# Altium PCB Integrated LED.PcbDoc
Units mil, origin at the board's own origin, x right, y up, seen from the top; angles counter-clockwise.
Board outline 1985 x 2580 mil, 4 copper layers (Top Layer, Internal Plane 1, Internal Plane 2, Bottom Layer); 39 components, 34 nets, 132 pads, 81 vias.
Unrouted connection lines stored in the file: 1.
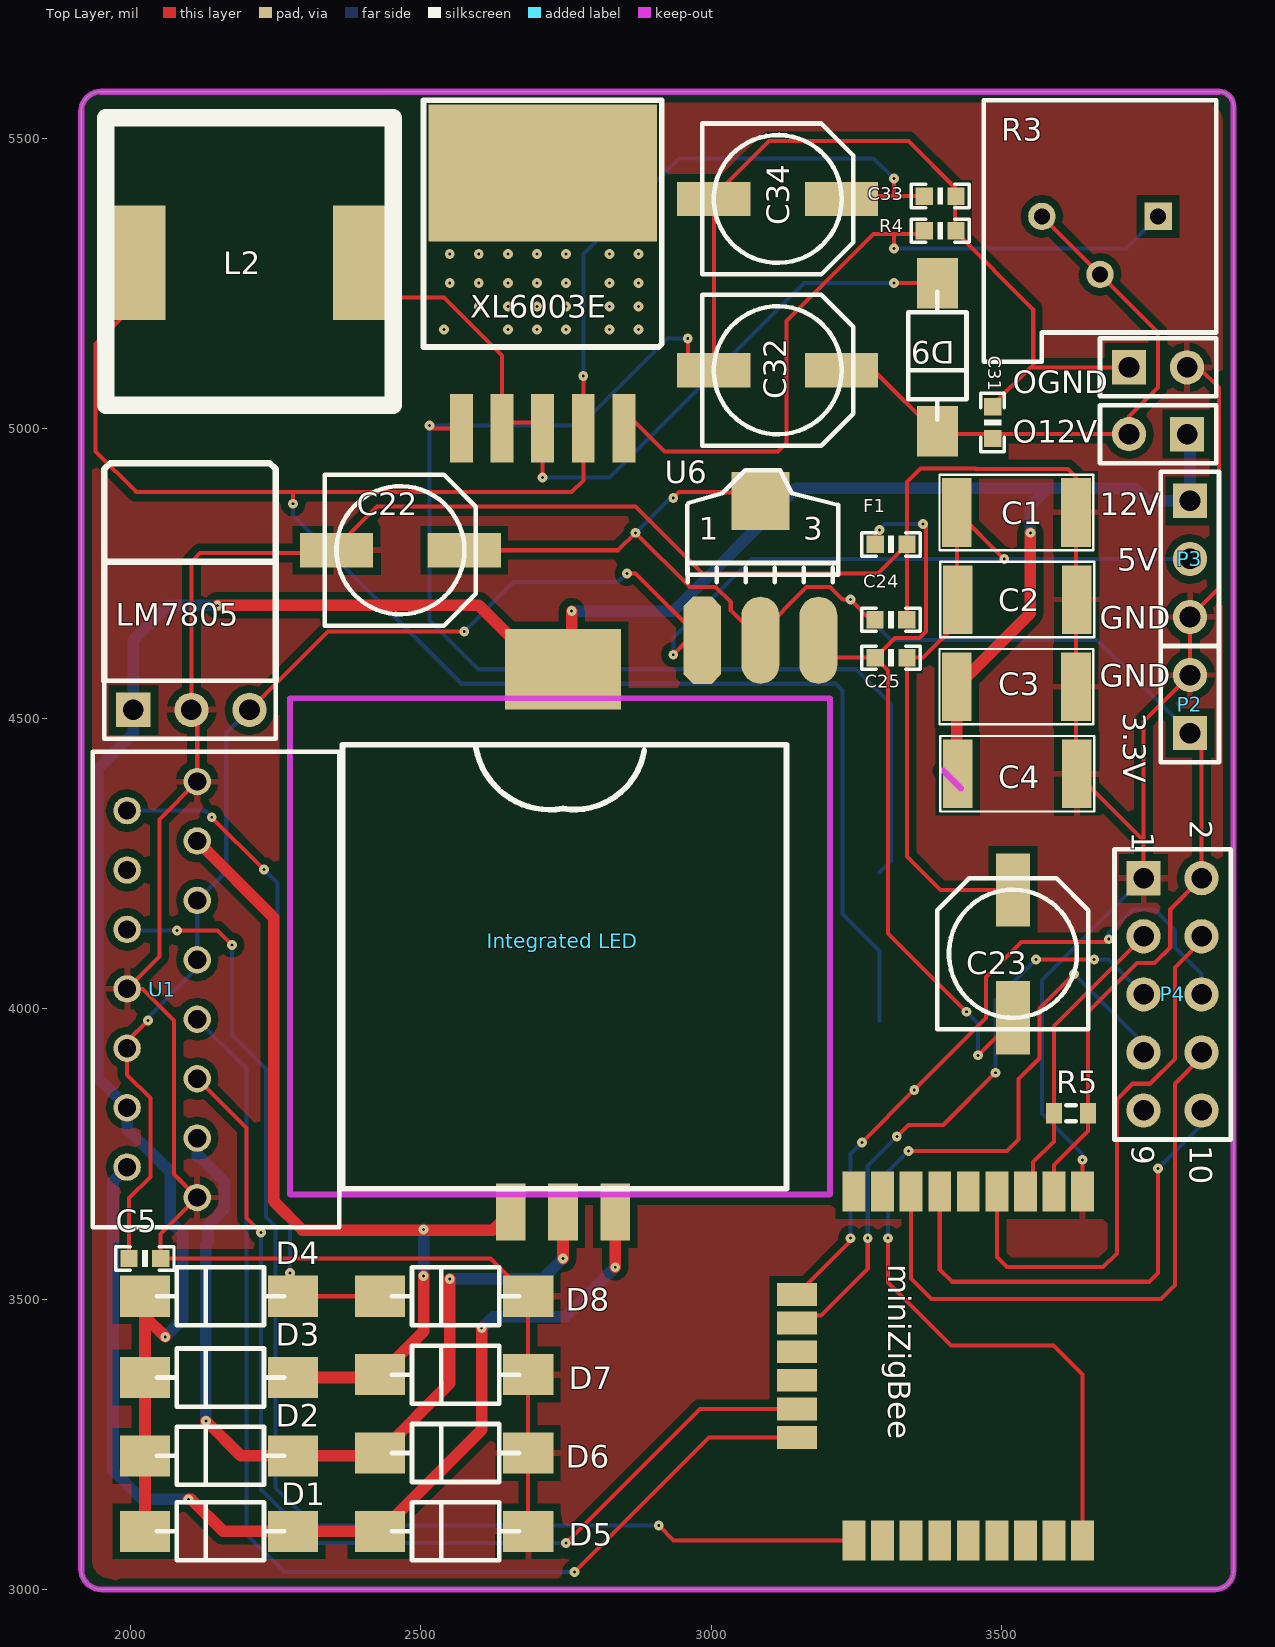
[diagram p0: Top Layer view]
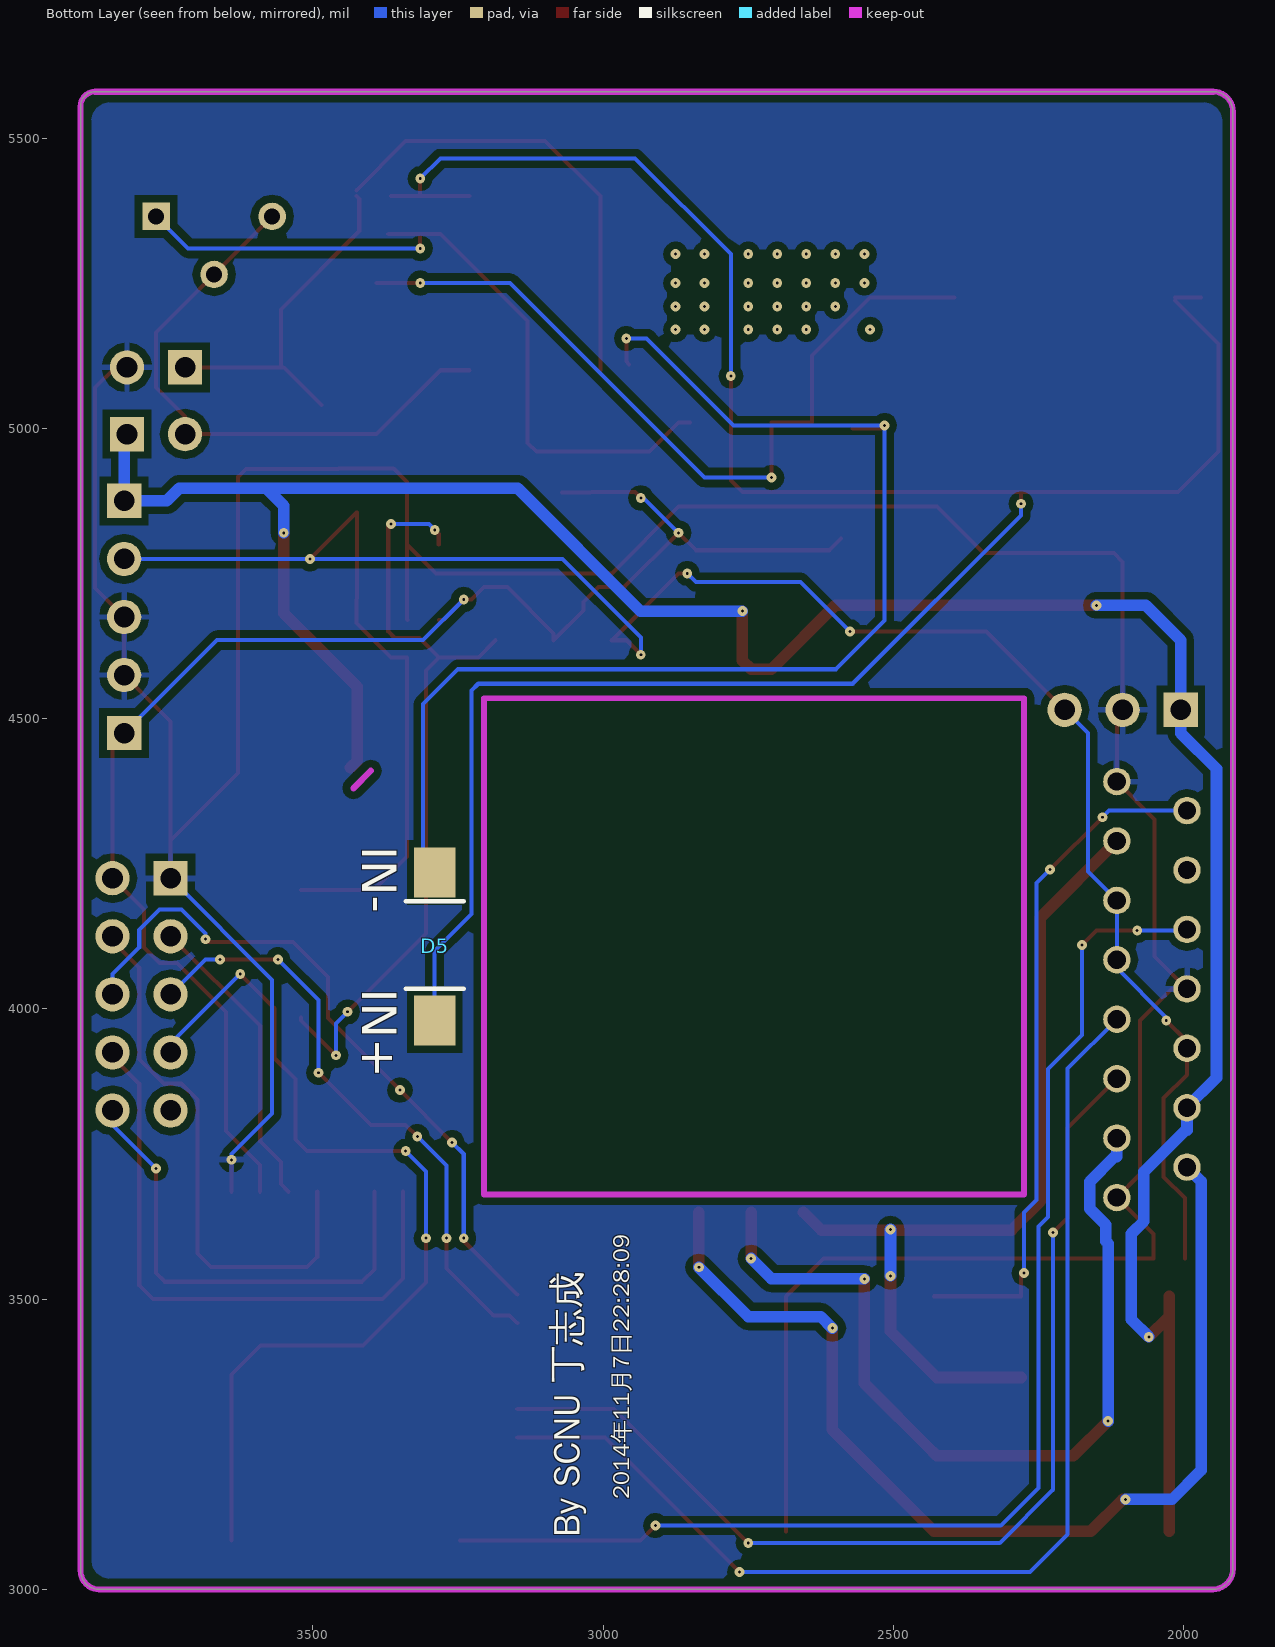
[diagram p1: Bottom Layer view, seen from below]
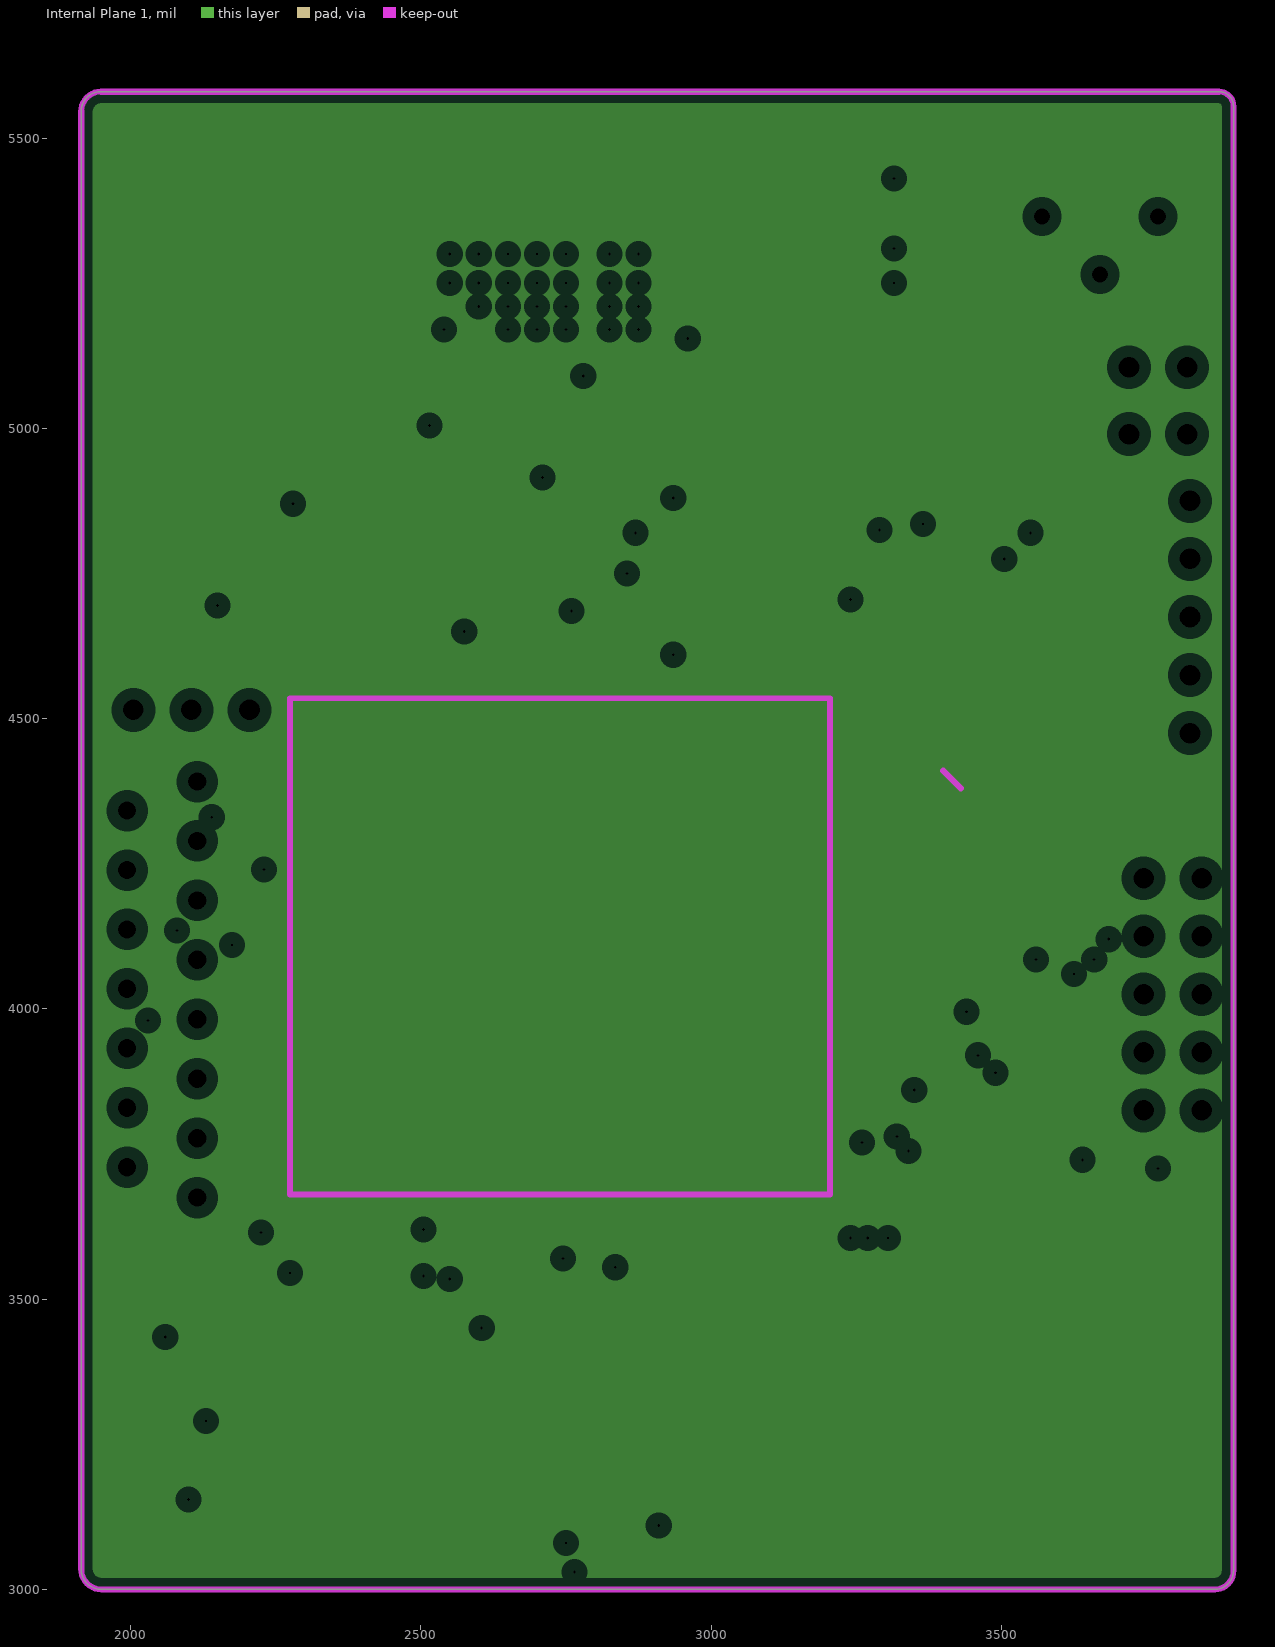
[diagram p2: Internal Plane 1, clearances drawn from the general rule]
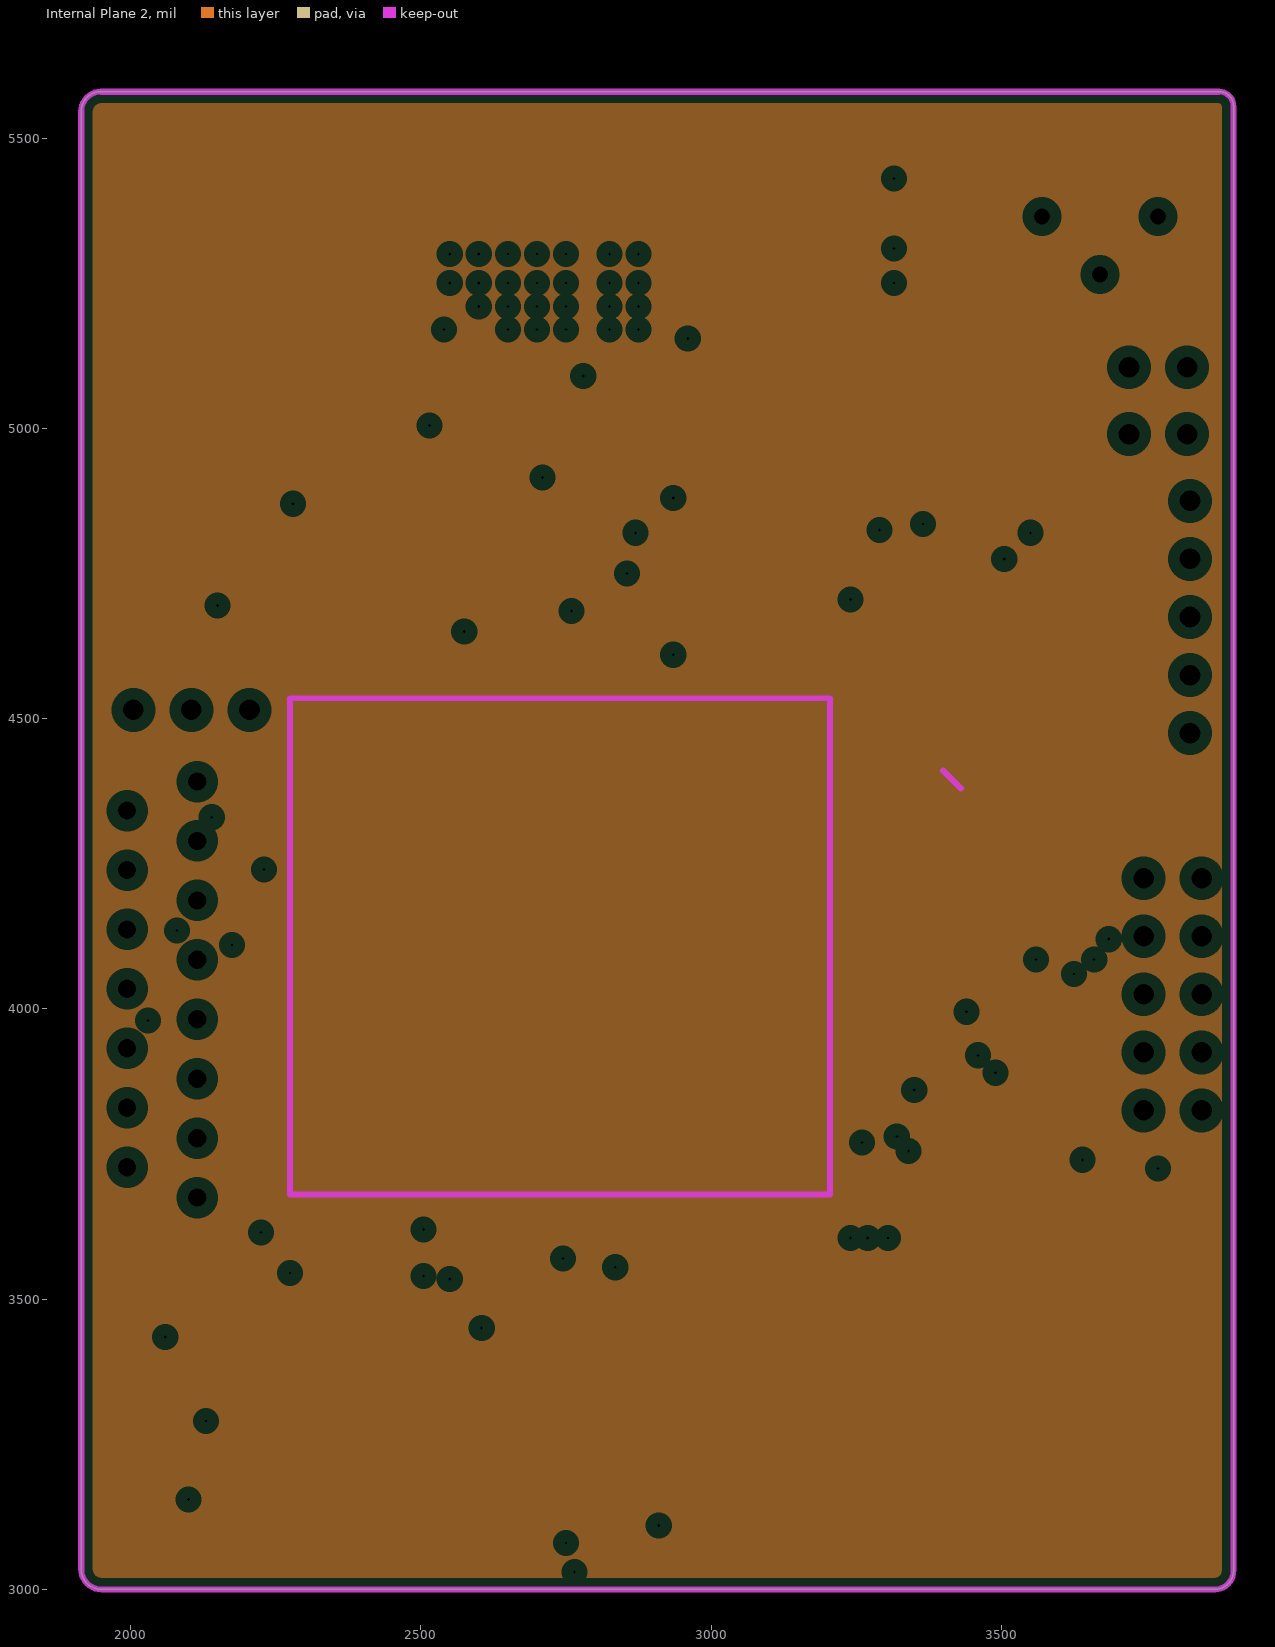
[diagram p3: Internal Plane 2, clearances drawn from the general rule]

## Layer stack, top to bottom
Top Layer: signal copper 1.4
Dielectric: dielectric 12.6, FR-4, Dk 4.8
Internal Plane 1: plane copper 1.4
Dielectric: dielectric 12.6, FR-4, Dk 4.8
Internal Plane 2: plane copper 1.4
Dielectric: dielectric 12.6, FR-4, Dk 4.8
Bottom Layer: signal copper 1.4

## Board outline
1915,3035 1915,5545.86 cw(c1949.14,5545.86) 1949.14,5580 3875,5580 cw(c3875,5555) 3900,5555 3900,3032.25 cw(c3867.75,3032.25) 3867.75,3000 1950,3000 cw(c1950,3035)

## Design rules (kind name [scope] priority, off if disabled: settings)
Clearance [All] p1: gap=13
FabricationTestpoint [(IsPad And (OnTopLayer Or OnBottomLayer))] p1: side=3 testpointundercomponent=TRUE minsize=40 maxsize=100 preferedsize=60 minholesize=0 maxholesize=40 preferedholesize=32 testpointgrid=1 allowsidetop=TRUE allowsidebottom=TRUE usegrid=TRUE gridtolerance=0.01
PlaneClearance [All] p1: clearance=20
PlaneConnect [All] p1: planeconnectstyle=Relief reliefexpansion=20 reliefentries=4 reliefconductorwidth=10 reliefairgap=10
PolygonConnect [All] p1: connectstyle=Relief reliefconductorwidth=10 reliefentries=4 polygonreliefangle="90 Angle" airgapwidth=10
RoutingVias [All] p1: holewidth=5 width=17 viastyle="Through Hole" minholewidth=5 minwidth=17 maxholewidth=5 maxwidth=17
SolderMaskExpansion [All] p1: expansion=4
Width Width_1 [All] p1: maxlimit=20 minlimit=7 preferedwidth=7 minimp=50.000000 maximp=50.000000 favimp=50.000000
Width [All] p2: maxlimit=20 minlimit=7 preferedwidth=7
25 further rules are at their usual default settings.

## Classes and differential pairs
component class "Integrated LED": C1 C2 C3 C4 C5 C22 C23 C24 C25 C31 C32 C33 C34 D1 D2 D3 D4 D5 D6 D7 D8 D9 F1 "Integrated LED" LM7805 miniZigBee P2 P3 P4 R5 U1 U6

## Components (designator, comment, footprint, x,y, rotation, side; value= is the part's Value field where it differs from the comment)
C1 "" PCBComponent_1 3423.5,4855 r0 top
C2 "" PCBComponent_1 3425,4705 r0 top
C3 "" PCBComponent_1 3423.5,4555 r0 top
C4 "" PCBComponent_1 3425,4405 r0 top
C5 "104" 0603P 2025,3570 r180 top
C22 "220uF" CC6.56.5 2465,4790 r180 top
C23 "220uF" CC6.56.5 3520,4095 r270 top
C24 "104" 0603P 3310,4670 r180 top
C25 "104" 0603P 3310,4605 r0 top
C31 "104" 0603P 3485,5010 r270 top (schematic designator C25)
C32 "220uF" CC6.56.5 3115,5100 r180 top (schematic designator C22)
C33 "104" 0603P 3395,5400 r180 top (schematic designator C25)
C34 "220uF" CC6.56.5 3115,5395 r180 top (schematic designator C22)
D1 "IN4007" IN4007#1 2280,3100 r180 top
D2 "IN4007" IN4007#1 2280,3230 r180 top
D3 "IN4007" IN4007#1 2280,3365 r180 top
D4 "IN4007" IN4007#1 2280,3505 r180 top
D5 "IN4007" IN4007#1 2685,3100 r180 top
D5 "IN4007" IN4007#2 3290,4235 r270 top
D6 "IN4007" IN4007#1 2685,3235 r180 top
D7 "IN4007" IN4007#1 2685,3370 r180 top
D8 "IN4007" IN4007#1 2685,3505 r180 top
D9 "IN4007" IN4007#1 3390,5250 r270 top (schematic designator D5)
F1 "500mA" 0603P 3310,4800 r0 top
"Integrated LED" "Integrated LED" "Integrated LED" 2745,4450 r0 top
L2 "Inductor" l 2205,5285 r180 top
LM7805 "LM7805" LM7805 2005,4515 r0 top
miniZigBee "miniZigBee" miniZigBee 3640,3685 r270 top
O12V "Header 2" HDR1X2 3820,4990 r180 top (schematic designator OUT+1)
OGND "Header 2" HDR1X2 3720,5105 r0 top (schematic designator OUT-1)
P2 "Header 2" HDR1X2 3825,4475 r90 top
P3 "Header 3" HDR1X3 3825,4875 r270 top
P4 "Header 5X2" HDR2X5 3745,4225 r270 top
R3 "103" VR4 3670,5315 r180 top
R4 "104" 0603P 3395,5340 r180 top (schematic designator C25)
R5 "Res3" J1-0603 3620,3820 r180 top
U1 "L298N" "L298N - duplicate" 2115,3675 r180 top
U6 "AMS1117-3.3" AMS1117 2985,4635 r0 top
XL6003E "XL6009e" XL6003 2710,5220 r0 top (schematic designator XL1)

## Footprints (in the part's own frame and the unit in brackets; to place one, negate y for a bottom-side part, rotate by r counter-clockwise, add the part's x,y. Pads: shape width x height; smd on the part's side, far side on the other; paste and mask are expansions set on the pad)
0603P [mil]
  rect 30x30 smd: 1(-27,0) 2(27.5,-0.06)
  silkscreen extent -50,-20 50,20
AMS1117 [mil]
  oct 65x150 smd: 1(0.03,-0.06)
  oval 65x150 smd: 2(100.03,-0.06) 3(200.03,-0.06)
  rect 100x100 smd: 4(100.03,239.94)
  silkscreen extent -26,100 234,293
CC6.56.5 [mm]
  rect 3.2x1.5 smd: 1(-2.794,0) 2(2.8,0)
  silkscreen extent -3.3,-3.3 3.3,3.3
HDR1X2 [mm] "Connector; Header; 2 Position"
  rect 1.5x1.5 hole 0.9: 1(0,0)
  round 1.5 hole 0.9: 2(2.54,0)
  silkscreen extent -1.27,-1.27 3.81,1.27
HDR1X3 [mm] "Connector; Header; 3 Position"
  rect 1.5x1.5 hole 0.9: 1(0,0)
  round 1.5 hole 0.9: 2(2.54,0) 3(5.08,0)
  silkscreen extent -1.27,-1.27 6.35,1.27
HDR2X5 [mm] "Connector; Header; 5x2 Position"
  rect 1.5x1.5 hole 0.9: 1(0,0)
  round 1.5 hole 0.9: 2(0,2.54) 3(2.54,0) 4(2.54,2.54) 5(5.08,0) 6(5.08,2.54) 7(7.62,0) 8(7.62,2.54) 9(10.16,0) 10(10.16,2.54)
  silkscreen extent -1.27,-1.27 11.43,3.81
IN4007#1 [mm]
  rect 2.2x1.8 smd: 1(0,0) 2(6.477,0)
  silkscreen extent 0.38,-1.27 5.97,1.27
IN4007#2 [mm]
  rect 2.2x1.8 smd far side: 1(0,0) 2(6.477,0)
"Integrated LED" [mm] "Integrated LED"
  rect 5.08x3.524 smd: 1(0,3.429)
  rect 1.3x2.5 smd: 2(-2.286,-20.32) 3(0,-20.32) 4(2.286,-20.32)
  Keep-Out Layer lines w0.254: -11.938,-19.558 -11.938,2.159 11.684,2.159 11.684,-19.558 -11.938,-19.558
  silkscreen extent -9.65,-19.3 9.78,0.13
J1-0603 [mm] "Chip Resistor, Body 1.6x0.8mm, IPC High Density"
  rect 0.7x0.9 smd: 1(-0.75,0) 2(0.75,0)
  silkscreen extent -0.2,-0.35 0.2,0.35, body extent -0.85,-0.48 0.85,0.48, height 0.9
l [mm]
  rect 2.45x5 smd: 0(-4.889,0) 1(4.889,0)
  silkscreen extent -6.29,-6.35 6.29,6.22
"L298N - duplicate" [mm]
  round 1.2 hole 0.8: 1(0,0) 2(3.068,-1.33) 3(0,-2.6) 4(3.068,-3.93) 5(0,-5.2) 6(3.068,-6.53) 7(0,-7.8) 8(3.068,-9.13) 9(0,-10.4) 10(3.068,-11.73) 11(0,-13) 12(3.068,-14.33) 13(0,-15.6) 14(3.068,-16.93) 15(0,-18.2)
  silkscreen extent -6.22,-19.5 4.57,1.3
LM7805 [mm]
  rect 1.5x1.5 hole 0.9: 1(0,0)
  round 1.5 hole 0.9: 3(5.08,0) 4(2.54,0)
  silkscreen extent -1.27,-1.27 6.22,10.79
miniZigBee [mm] "miniZigBee"
  rect 1.75x1 smd: 1(0,0) 2(0,-1.25) 3(0,-2.5) 4(0,-3.75) 5(0,-5) 6(0,-6.25) 7(0,-7.5) 8(0,-8.75) 9(0,-10) 16(15.25,-10) 17(15.25,-8.75) 18(15.25,-7.5) 19(15.25,-6.25) 20(15.25,-5) 21(15.25,-3.75) 22(15.25,-2.5) 23(15.25,-1.25) 24(15.25,0)
  rect 1x1.75 smd: 10(4.5,-12.5) 11(5.75,-12.5) 12(7,-12.5) 13(8.25,-12.5) 14(9.5,-12.5) 15(10.75,-12.5)
PCBComponent_1 [mm]
  rect 1.3x3 smd: 1(0,0) 2(5.207,0)
  silkscreen extent -0.76,-1.65 5.97,1.65
VR4 [mm] "Feed-Through Capacitor; 3 Leads"
  rect 1.2x1.2 hole 0.7: 1(-2.54,-1.27)
  round 1.2 hole 0.7: 2(0,1.27) 3(2.54,-1.27)
  silkscreen extent -5.08,-6.35 5.08,5.08
XL6003 [mm]
  rect 10x6 smd: 0(0,5.588)
  rect 1x3 smd: 1(-3.556,-5.588) 2(-1.778,-5.588) 3(0,-5.588) 4(1.778,-5.588) 5(3.556,-5.588)
  silkscreen extent -5.21,-2.03 5.21,8.76

## Part data
C1 C2 C3 C4: library part Cap2, "Capacitor"
C5 C24 C25 C31 C33 R4: library part C
C22 C23 C32 C34: library part CAP
F1: library part R
O12V OGND P2: "Header, 2-Pin"
P3: "Header, 3-Pin"
P4: "Header, 5-Pin, Dual row"
R3: library part RPot, "Potentiometer"
R5: "Resistor"
U6: library part AMS1117

## Via types
v1: diameter 17, hole 5, Top Layer to Bottom Layer, 81 vias

## Nets (pads, with @x,y where several pads share a name; then routed paths per layer and width w, separated by ;. In a path a pad name is that pad's centre, name@x,y a point inside that pad or via, vN(x,y) a via of type N, cw(c..) or ccw(c..) an arc to the next point about the centre after c; other vN are vias at no path point)
BLUE: "Integrated LED.2" D3.1 D7.2 U1.13 | length 1549.9
  Top Layer w20: U1.13 2247,4157.17 2247,3668.4 2296.4,3619 2624,3619 2655,3650 ; D3.1 2425,3365 D7.2 2505,3445 v1(2505,3540)
  Bottom Layer w20: v1(2505,3540) v1(2505,3620)
GND: C1.2 C2.2 C3.2 C4.2 C5.1 C22.2 C24.1 D5.1@2685,3100 D6.1 D7.1 D8.1 F1.2 LM7805.4 miniZigBee.1 OGND.2 P2.2 P3.3 P4.1 U1.1 U1.8 U1.15 | length 6579.5
  Top Layer w7: D5.1@2685,3100 D8.1 2620,3570 C5.1 2052,3612 U1.1 2074.88,3715.12 2074.88,3980.12 2020.55,4034.45 U1.8 2050,4090.24 2050,4326.54 U1.15 2115,4505 LM7805.4 2105,4770 2120,4785 2344.76,4785 2424.76,4865 2870,4865 2985,4750 3287.56,4750 F1.2 ; C24.1 3337.5,4670.5 3337.5,4907.5 3360.56,4930.56 3455.93,4930.56 3456.48,4930 3615,4930 3628.5,4916.5 3628.5,4406.5 3745,4290 ; miniZigBee.1 v1(3640,3740) ; P4.1 3745,4495 P2.2 P3.3 3875,4725 3875,5070 3840,5105 OGND.2
  Bottom Layer w7: v1(3640,3740) 3640,3750 3570,3820 3570,4050 P4.1
GREEN: "Integrated LED.3" D2.1 D6.2 U1.3 | length 1484.2
  Top Layer w20: v1(2130,3290) 2190,3230 D2.1 2425,3230 D6.2 2550,3355 v1(2550,3535) ; v1(2745,3570) 2745,3650
  Bottom Layer w20: 2115,3745 U1.3 ; 2119.07,3745 2161.62,3702.44 2161.62,3655.69 2134.31,3628.38 2134.31,3600.05 2130,3595.74 v1(2130,3290) ; v1(2550,3535) 2710,3535 v1(2745,3570)
Net33_1: C31.1 C32.2 C33.1 C34.2 D5.1@3290,4235 OGND.1 R4.1 XL6003E.1 | length 3502.9
  Top Layer w7: v1@2520,5000 XL6003E.1 ; C32.2@2955,5110 2960,5115 v1(2960,5155) ; C32.2@3005,5100 3004.76,5100.24 3004.76,5399.76 3100,5495 3340,5495 C33.1@3425,5410 ; C33.1@3425,5400 3420,5395 3420,5340 3555,5205 3555,5105 ; C31.1@3485,5040 3550,5105 OGND.1
  Bottom Layer w7: v1(2960,5155) 2925,5155 2775,5005 v1(2515,5005) 2515,4668.75 2598.75,4585 3250,4585 3310,4525 3310,4255 D5.1@3290,4235
Net33_2: C33.2 C34.1 D5.2@3290,3980 L2.1 XL6003E.4 | length 4092.4
  Top Layer w7: L2.1@1970,5225 L2.1@2015,5225 ; L2.1@2015,5220 1940,5145 1940,4960 2010,4890 2760,4890 2780,4910 v1(2780,5090) ; v1(2280,4870) 2280,4890 ; C34.1@3230,5400 C33.2@3365,5400 ; 3315,5400 v1(3315,5430)
  Bottom Layer w7: v1(2280,4870) 2280,4850 2570,4560 3215,4560 3226.5,4548.5 3226.5,4163.5 3290,4100 D5.2@3290,3980 ; v1(2780,5090) 2780,5300 2945,5465 3280,5465 v1(3315,5430)
NetC23_2: C23.2 C25.1 F1.1 U6.3 | length 1358.2
  Top Layer w7: U6.3 3214.97,4605 3240,4605 C25.1 ; F1.1 3283,4818 v1(3290,4825) ; v1(3365,4835) 3370,4830 3370,4649.67 3358.83,4638.5 3316.5,4638.5 C25.1 ; v1(3440,3995) 3305,4130 3305,4583 C25.1 ; v1(3460,3920) 3520,3980 C23.2
  Bottom Layer w7: v1(3290,4825) 3300,4835 v1(3365,4835) ; v1(3440,3995) 3460,3975 v1(3460,3920)
NetC31_2: C31.2 C32.1 D9.2 O12V.2 R3.2 R3.3 | length 1009.1
  Top Layer w7: C32.1@3230,5100 3280,5100 3390,4990 3495,4990 O12V.2 ; R3.3 3770,5165 3770,5070 3720,5020 O12V.2@3720,4995
NetD4_1: D4.1 D8.2 U1.14 | length 1183.6
  Top Layer w7: v1(2140,4330) v1(2230,4240) ; v1(2275,3545) 2280,3540 D4.1 D8.2
  Bottom Layer w7: U1.14 2128.46,4341.54 v1(2140,4330) ; v1(2230,4240) 2253.5,4216.5 2253.5,3671.09 2275,3649.59 v1(2275,3545)
NetD9_1: D9.1 L2.0 XL6003E.2 XL6003E.3 | length 1378.7
  Top Layer w7: L2.0@2395,5225 2540,5225 2640,5125 2640,5010 XL6003E.3@2710,5010 ; v1@2710,4916.5 XL6003E.3@2710,5005 ; v1(3315,5250) D9.1
  Bottom Layer w7: v1(2710,4915) 2825,4915 3160,5250 v1(3315,5250)
NetR3_1: R3.1 R4.2 XL6003E.5 | length 1321.8
  Top Layer w7: XL6003E.5@2850,5010 2870,5010 2920,4960 3115,4960 3130,4975 3130,5185 3280,5335 R4.2@3370,5335 ; v1(3315,5310) 3315,5335
  Bottom Layer w7: v1(3315,5310) 3715,5310 R3.1
P0_0: miniZigBee.23
P0_1: miniZigBee.22
P0_2: miniZigBee.21
P0_3: miniZigBee.20
P0_4: miniZigBee.19
P0_5: miniZigBee.18
P0_6: miniZigBee.17
P0_7: miniZigBee.16 U1.10 | length 2191.7
  Top Layer w7: v1(2080,4135) 2150,4135 v1(2175,4110) ; v1(2910,3110) 2935.39,3084.61 miniZigBee.16
  Bottom Layer w7: U1.10 1996.02,4135 v1(2080,4135) ; v1(2175,4110) 2175,3955 2233.5,3896.5 2233.5,3641.86 2250,3625.36 2250,3175 2315,3110 v1(2910,3110)
P1_0: miniZigBee.15 U1.7 | length 1993.1
  Top Layer w7: v1(2765,3030) 2996.77,3261.77 miniZigBee.15
  Bottom Layer w7: U1.7 2200,3897.09 2200,3095 2265,3030 v1(2765,3030)
P1_1: miniZigBee.14 U1.5 | length 1810.1
  Top Layer w7: U1.5 2200,3794.72 2200,3640 v1(2225,3615) ; v1(2750,3080) 2980.98,3310.98 miniZigBee.14
  Bottom Layer w7: v1(2225,3615) 2225,3171.72 2316.72,3080 v1(2750,3080)
P1_2: miniZigBee.13
P1_3: miniZigBee.12
P1_4: miniZigBee.11 P4.5 | length 1058.6
  Top Layer w7: miniZigBee.11 3160.9,3471.65 3189.16,3471.65 3270,3552.49 v1(3270,3605) ; v1(3320,3780) 3340,3800 3400,3800 v1(3490,3890) ; v1(3560,4085) v1(3660,4085)
  Bottom Layer w7: v1(3270,3605) 3270,3730 v1(3320,3780) ; v1(3490,3890) 3490,4015 v1(3560,4085) ; v1(3660,4085) 3685,4085 P4.5
P1_5: miniZigBee.10 P4.6 | length 1205.6
  Top Layer w7: miniZigBee.10 3240,3599.96 v1(3240,3605) ; v1(3260,3770) v1(3350,3860) 3473.97,3983.97 3473.97,4054.59 3534.38,4115 3680,4115 v1(3685,4120)
  Bottom Layer w7: v1(3240,3605) 3240,3750 v1(3260,3770) ; v1(3685,4120) 3685,4130.09 3725.93,4171.03 3764.07,4171.03 3798.97,4136.12 3798.97,4105.93 3845,4059.91 P4.6
P1_6: miniZigBee.7 P4.8 | length 1048.6
  Top Layer w7: miniZigBee.7 3344.72,3535.28 3380,3500 3775,3500 3798.97,3523.97 3798.97,3871.03 3845,3917.06 P4.8
P1_7: miniZigBee.6 P4.10 | length 836
  Top Layer w7: miniZigBee.6 3393.94,3551.06 3415,3530 3755,3530 3770,3545 v1(3770,3725)
  Bottom Layer w7: v1(3770,3725) 3845,3800 P4.10
P2_0: miniZigBee.5
P2_1: miniZigBee.4 P4.4 | length 960.4
  Top Layer w7: miniZigBee.4 3492.36,3572.64 3510,3555 3675,3555 3698.97,3578.97 3698.97,3844.07 3725.93,3871.03 3756.12,3871.03 3798.97,3913.88 3798.97,4071.03 3845,4117.06 P4.4
P2_2: miniZigBee.3 P4.3 R5.2 | length 524.3
  Top Layer w7: miniZigBee.3 3554.6,3698.03 3554.6,3735.95 3590.47,3771.82 R5.2 3590.47,3970.47 P4.3
RED: "Integrated LED.4" D1.1 D5.2@2430,3100 U1.2 | length 1826.9
  Top Layer w20: v1(2100,3155) 2105,3155 2160,3100 D1.1 2430,3100 2605,3275 v1(2605,3450) ; v1(2835,3555) 2835,3650
  Bottom Layer w20: U1.2 1970,3703.15 1970,3205 2020,3155 v1(2100,3155) ; v1(2605,3450) 2625,3470 2750,3470 v1(2835,3555)
RESET: miniZigBee.24 P4.7 | length 1634.4
  Top Layer w7: v1(3305,3605) 3305,3528.5 3413.5,3420 3590,3420 3640,3370 miniZigBee.24 ; v1(3340,3755) 3510,3755 3530,3775 3530,3878.91 3566.03,3914.94 3566.03,4001.03 v1(3625,4060)
  Bottom Layer w7: v1(3305,3605) 3305,3720 v1(3340,3755) ; v1(3625,4060) 3745,3940 P4.7
VCC3.3: C22.1 C24.2 miniZigBee.2 P2.1 P4.2 R5.1 U6.2 U6.4 | length 2698.4
  Top Layer w7: C22.1@2590,4810 2610,4790 2840,4790 v1(2870,4820) 2963.56,4726.44 3008.12,4726.44 3034.03,4700.52 3034.03,4685.94 U6.2 3085.03,4646.73 3164.74,4726.44 3205.33,4726.44 3226.76,4705 v1(3240,4705) 3274.94,4670.06 C24.2 ; v1(2935,4880) 2945,4890 3020.36,4890 3021.28,4889.08 U6.4@3070.89,4889.08 ; miniZigBee.2 3590.79,3730.79 3649.53,3789.53 3649.53,3994.62 3733.88,4078.97 3764.07,4078.97 3791.03,4105.93 3791.03,4171.03 P4.2 3845,4455 P2.1
  Bottom Layer w7: v1(2870,4820) 2930,4880 v1(2935,4880) ; v1(3240,4705) 3310,4635 3665,4635 P2.1
VCC5: C1.1 C2.1 C5.2 C23.1 C25.2 LM7805.3 P3.2 U1.6 U1.9 U1.11 U6.1 | length 3989.7
  Top Layer w7: C5.2 1997.5,3673.91 2034.33,3710.74 2034.33,3846.34 1994.21,3886.47 U1.6 1994.21,3944.21 v1(2030,3980) ; LM7805.3 2340,4650 v1(2575,4650) ; v1(2855,4750) 2869.97,4750 U6.1 2959.94,4634.94 v1(2935,4610) ; C2.1@3423.5,4706.5 C1.1 3425,4855 v1(3505,4775) ; C2.1 3425,4665 3364.94,4604.94 C25.2 3337.5,4262.5 3395,4205 C23.1
  Bottom Layer w7: v1(2030,3980) 2030,3985 2115,4070 U1.9 U1.11 2165,4236.81 2165,4475 LM7805.3 ; v1(2575,4650) 2660,4735 2840,4735 v1(2855,4750) ; v1(2935,4610) 2935,4640 3070,4775 v1(3505,4775) P3.2
VCC12: "Integrated LED.1" C3.1 C4.1 D1.2 D2.2 D3.2 D4.2 LM7805.1 O12V.1 P3.1 U1.4 | length 4522.8
  Top Layer w20: D1.2 D2.2 D3.2 D4.2@2025,3470 ; D4.2 D4.2@2025,3470 ; v1(2060,3435) D4.2@2025,3470 ; v1(2150,4695) 2600,4695 2710,4585 2745,4585 2760,4600 v1(2760,4685) ; C4.1@3435.26,4415.26 3423.5,4427.01 C3.1 3550,4681.5 v1(3550,4820)
  Bottom Layer w20: U1.4 1994.21,3790.79 1996.72,3790.79 2068.38,3719.13 2068.38,3634.07 2090,3612.44 2090,3465 v1(2060,3435) ; U1.4@1995,3830 1943.47,3881.53 1943.47,4413.47 2005,4475 2005,4635 2065,4695 v1(2150,4695) ; v1(2760,4685) 2935.45,4685 3146.95,4896.5 3730,4896.5 3751.5,4875 P3.1@3840,4875 ; v1(3550,4820) 3550,4866.5 3580,4896.5 ; 3720,5000 3730,4990 ; P3.1 O12V.1@3825,4985
pads on no net: miniZigBee.8 miniZigBee.9 P4.9 U1.12 XL6003E.0
copper on no net:
  other v1: 2540,5170 2650,5170 2700,5170 2750,5170 2825,5170 2875,5170 2600,5210 2650,5210 2700,5210 2750,5210 2825,5210 2875,5210 2550,5250 2600,5250 2650,5250 2700,5250 2750,5250 2825,5250 2875,5250 2550,5300 2600,5300 2650,5300 2700,5300 2750,5300 2825,5300 2875,5300

## Polygon pours and split planes (outlines as drawn)
GND on Top Layer "Bottom Layer-No Net" (solid, remove dead copper, pour order 2): 1835,5630 3960,5630 3960,2980 3905,2925 3895,2935 1810,2935
GND on Bottom Layer "Bottom Layer-No Net" (solid, remove dead copper, pour order 4): 1870,5675 3875,5675 4040,5510 4020,5490 4020,2935 1890,2935 1870,2955
GND on Bottom Overlay "Top Layer-No Net" (solid, remove dead copper): 1825,4985 1890,5050 4320,5050
no net on Internal Plane 1 (split plane): 1949.14,5559.9 3875,5559.9 3875.31,5559.93 3876.91,5559.62 3878.53,5558.53 3879.62,5556.91 3879.93,5555.31 3879.9,5555 3879.9,3032.25 3879.93,3031.96 3879.72,3029.87 3879.03,3027.58 3877.9,3025.47 3876.38,3023.62 3874.53,3022.1 3872.42,3020.97 3870.13,3020.28 3868.03,3020.07 3867.75,3020.1 1950,3020.1 1949.65,3020.06 1947.08,3020.32 1944.27,3021.17 1941.68,3022.55 1939.41,3024.41 1937.55,3026.68 1936.17,3029.27 1935.32,3032.08 1935.06,3034.65 1935.1,3035 1935.1,5545.86 1935.06,5546.19 1935.3,5548.61 1936.11,5551.26 1937.41,5553.7 1939.16,5555.84 1941.3,5557.59 1943.74,5558.89 1946.39,5559.7 1948.81,5559.94
no net on Internal Plane 2 (split plane): 1949.14,5559.9 3875,5559.9 3875.31,5559.93 3876.91,5559.62 3878.53,5558.53 3879.62,5556.91 3879.93,5555.31 3879.9,5555 3879.9,3032.25 3879.93,3031.96 3879.72,3029.87 3879.03,3027.58 3877.9,3025.47 3876.38,3023.62 3874.53,3022.1 3872.42,3020.97 3870.13,3020.28 3868.03,3020.07 3867.75,3020.1 1950,3020.1 1949.65,3020.06 1947.08,3020.32 1944.27,3021.17 1941.68,3022.55 1939.41,3024.41 1937.55,3026.68 1936.17,3029.27 1935.32,3032.08 1935.06,3034.65 1935.1,3035 1935.1,5545.86 1935.06,5546.19 1935.3,5548.61 1936.11,5551.26 1937.41,5553.7 1939.16,5555.84 1941.3,5557.59 1943.74,5558.89 1946.39,5559.7 1948.81,5559.94

## Keep-outs
Keep-Out Layer:
  lines w10: 1915,3035 ccw(c1950,3035) 1950,3000 ; 1915,5545.86 cw(c1949.14,5545.86) 1949.14,5580 ; 3867.75,3000 ccw(c3867.75,3032.25) 3900,3032.25 ; 3875,5580 cw(c3875,5555) 3900,5555
  lines w10.94: 1915,3035 1915,5545.86 ; 1949.14,5580 3875,5580 ; 1950,3000 3867.75,3000 ; 3400,4410.25 3430,4380.25 ; 3900,3032.25 3900,5555

## Silkscreen, mask and mechanical layers (free items; w line width, h text height)
Top Overlay:
  text "12V" at 3670,4850 h39
  text "5V" at 3700,4755 h39
  text "GND" at 3670,4655 h39
  text "GND" at 3670,4555 h39
  text "3.3V" at 3710,4510 h39 r270
Bottom Overlay:
  text "IN-" at 3415,4280 h60 r90
  text "IN+" at 3415,4035 h60 r90
  text "2014年11月7日22:28:09" at 2945,3155 h50 r270
  text "By SCNU 丁志成" at 3025,3090 h80 r270

## Text inside footprints (layer, text, board x,y; h text height)
P4: Top Overlay "2" at 3825,4325 h39 r270; Top Overlay "1" at 3725,4305 h39 r270; Top Overlay "9" at 3725,3765 h39 r270; Top Overlay "10" at 3825,3765 h39 r270
U6: Top Overlay "1" at 2979.03,4807.94 h39; Top Overlay "3" at 3159.03,4807.94 h39